# Altium PCB AD8310峰值检测.PcbDoc
Units mil, origin at the board's own origin, x right, y up, seen from the top; angles counter-clockwise.
Board outline 935 x 995 mil, 2 copper layers (Top Layer, Bottom Layer); 15 components, 8 nets, 38 pads, 0 vias.
Unrouted connection lines stored in the file: 4.
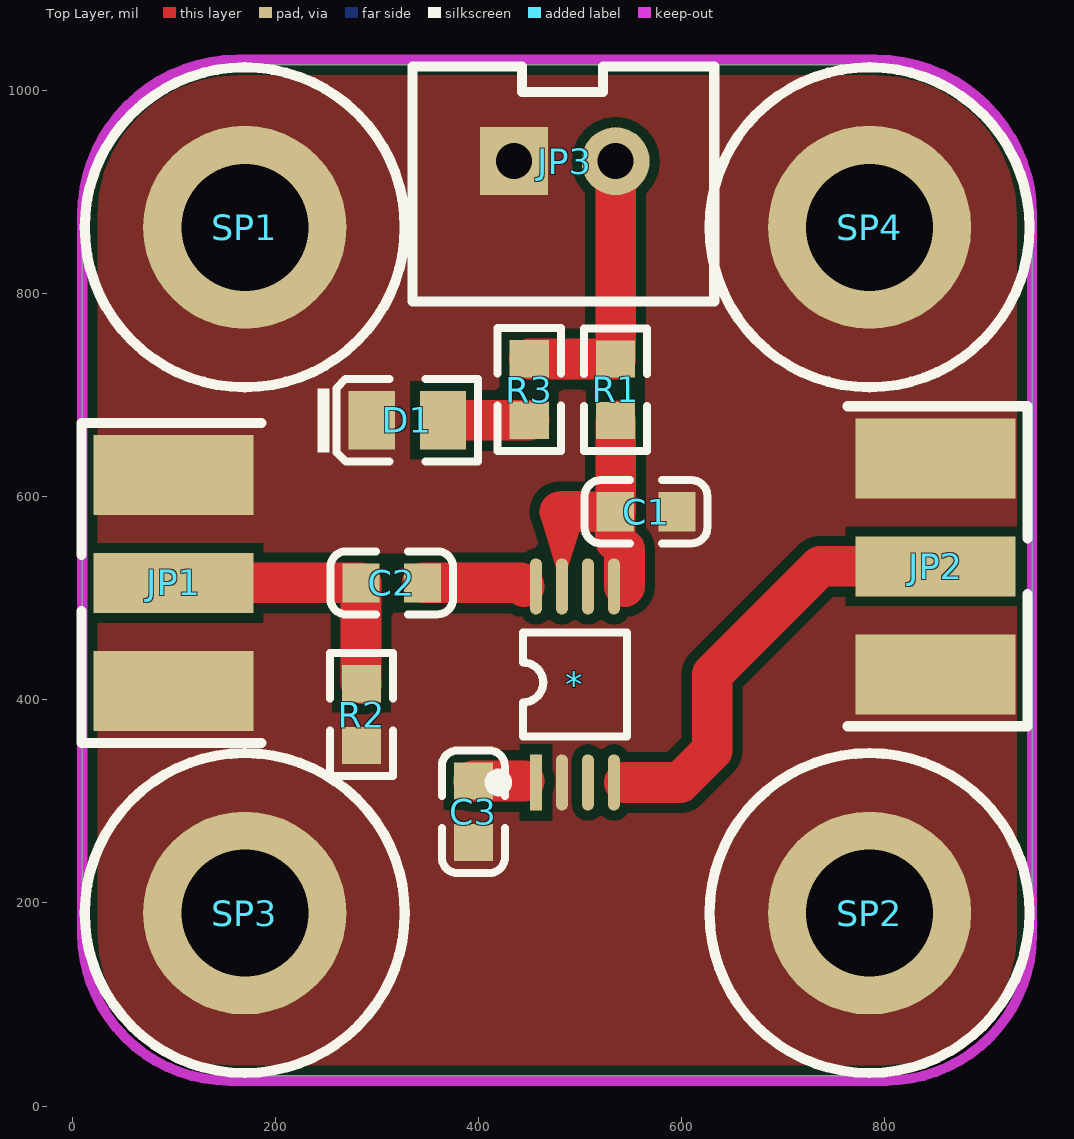
[diagram p0: Top Layer view]
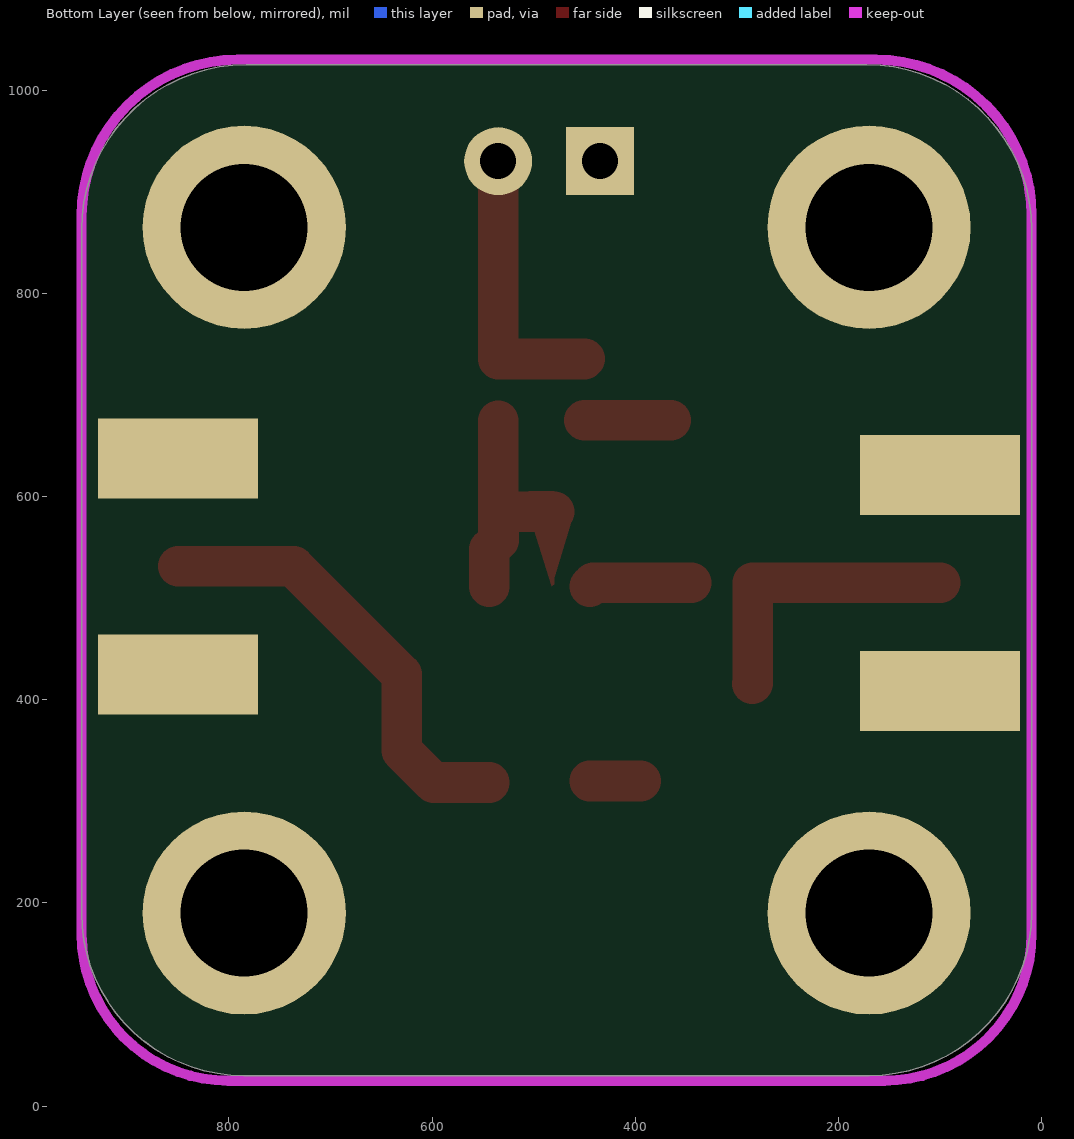
[diagram p1: Bottom Layer view, seen from below]

## Layer stack, top to bottom
Top Solder: solder mask 0.4, Solder Resist, Dk 3.5
Top Layer: signal copper 1.4
Dielectric 1: dielectric 12.6, FR-4, Dk 4.8
Bottom Layer: signal copper 1.4
Bottom Solder: solder mask 0.4, Solder Resist, Dk 3.5

## Board outline
10,190 ccw(c170,190) 170,30 210,30 785.19,30 ccw(c785.19,189.81) 945,189.81 945,862.92 ccw(c782.92,862.92) 782.92,1025 172.08,1025 ccw(c172.08,862.92) 10,862.92

## Design rules (kind name [scope] priority, off if disabled: settings)
Clearance [All] p1: gap=10 ignorepadtopadclearanceinfootprint=FALSE except(0: Arc-Hole Track-Hole SMDPad-Hole THPad-Hole Via-Hole Fill-Hole Poly-Hole Region-Hole Text-Hole)
PolygonConnect [All] p1: connectstyle=Direct reliefconductorwidth=10 reliefentries=4 polygonreliefangle="90 Angle" airgapwidth=10
RoutingVias [All] p1: holewidth=28 width=50 viastyle="Through Hole" minholewidth=28 minwidth=50 maxholewidth=28 maxwidth=50
SolderMaskExpansion [All] p1: expansion=4
Width [All] p1: maxlimit=40 minlimit=10 preferedwidth=15 bottomlayer_maxwidth=10 bottomlayer_prefwidth=10 minimp=50.000000 maximp=50.000000 favimp=50.000000
30 further rules are at their usual default settings.

## Components (designator, comment, footprint, x,y, rotation, side; value= is the part's Value field where it differs from the comment)
* "Component_1" MSOP8_N 495,415 r0 top
C1 "1.2nF (122) 10% 50V" 0603_C 565,585 r0 top
C2 "1.2nF (122) 10% 50V" 0603_C 314.69,515 r0 top
C3 "1.2nF (122) 10% 50V" 0603_C 395,289.68 r90 top
D1 "翠绿 0805" 0805_LED_S1 330.04,675 r0 top
JP1 "SMA WIFI 天线接口" SMA-KE 100,515 r90 top
JP2 "SMA WIFI 天线接口" SMA-KE 850,531.3 r270 top
JP3 "HDR-1X2" XH2.54-LI-2P 485,930 r0 top
R1 "1.5KΩ (1501) ±1%" 0603_R 535,705 r90 top
R2 "1.5KΩ (1501) ±1%" 0603_R 285,385.31 r90 top
R3 "1.5KΩ (1501) ±1%" 0603_R 450,705.32 r270 top
SP1 "M3铜柱" M3x4_L 170,865 r0 top
SP2 "M3铜柱" M3x4_L 785,190 r0 top
SP3 "M3铜柱" M3x4_L 170,190 r0 top
SP4 "M3铜柱" M3x4_L 785,865 r0 top

## Footprints (in the part's own frame and the unit in brackets; to place one, negate y for a bottom-side part, rotate by r counter-clockwise, add the part's x,y. Pads: shape width x height; smd on the part's side, far side on the other; paste and mask are expansions set on the pad)
0603_C [mm]
  rect 0.93x0.98 smd: 1(-0.77,0) 2(0.77,0)
  silkscreen extent -1.53,-0.79 1.54,0.79, body extent -0.8,-0.4 0.8,0.4, height 0.3
0603_R [mm]
  rect 0.93x0.98 smd: 1(-0.77,0) 2(0.77,0)
  silkscreen extent -1.53,-0.79 1.54,0.79, body extent -0.85,-0.4 0.85,0.4, height 0.56
0805_LED_S1 [mm]
  rect 1.16x1.47 smd: A(0.89,0) K(-0.89,0)
  silkscreen extent -2.24,-1.04 1.77,1.03, body extent -1.01,-0.62 1.01,0.62, height 1.1
M3x4_L [mil] "M3铜柱，长：4mm"
  round 200 hole 125: 1(0,0)
  silkscreen extent -157,-157 157,157, body extent -106,-93 106,93, height 159
MSOP8_N [mm] "塑封体长3mm，宽3mm，脚距0.65"
  rect 0.3x1.4 smd: 1(-0.975,-2.45)
  oval 0.3x1.4 smd: 2(-0.325,-2.45) 3(0.325,-2.45) 4(0.975,-2.45) 5(0.975,2.45) 6(0.325,2.45) 7(-0.325,2.45) 8(-0.975,2.45)
  silkscreen extent -2.07,-2.6 1.3,1.3, body extent -1.5,-2.45 1.5,2.45, height 0.95
SMA-KE [mm] "SMA 偏脚射频天线座     淘宝ID:黄晶宝石"
  rect 1.5x4 smd: 1(0,0)
  rect 2x4 smd: 2(-2.7,0) 2(2.7,0)
  rect 2x4 smd far side: 3(-2.7,0) 3(2.7,0)
  silkscreen extent -4,-2.2 4,2.3, body extent -3.25,-1.3 3.25,12.2, height 3.75
XH2.54-LI-2P [mm] "接插件，2P"
  rect 1.7x1.7 hole 0.9: 1(-1.27,0)
  round 1.7 hole 0.9: 2(1.27,0)
  silkscreen extent -3.81,-3.51 3.74,2.37, body extent -3.77,-3.3 3.77,2.4, height 7.05

## Part data
C1 C2 C3: library part "0603 1.2nF (122) 10% 50V", "贴片电容", Package=0603, SuppliersPartNumber=C30615, ComponentLink1Description=供应商链接, ComponentLink1URL=http://www.szlcsc.com/product/details_31372.html, Supplier=LC
D1: library part "0805 翠绿", "发光二极管", Package=0805, SuppliersPartNumber=C2297, ComponentLink1Description=供应商链接, ComponentLink1URL=http://www.szlcsc.com/product/details_2670.html, Supplier=LC
JP1 JP2: library part SMA, "SMA-2.4G射频天线接口"
JP3: library part "Header 2", "2P接插件", BOM名称=2P接插件
R1 R2 R3: library part "0603 1.5KΩ (1501) 1%", "贴片电阻", Package=0603, SuppliersPartNumber=C22843, ComponentLink1Description=供应商链接, ComponentLink1URL=http://www.szlcsc.com/product/details_23570.html, Supplier=LC
SP1 SP2 SP3 SP4: library part 铜柱小焊盘, "铜柱"

## Nets (pads, with @x,y where several pads share a name; then routed paths per layer and width w, separated by ;. In a path a pad name is that pad's centre, name@x,y a point inside that pad or via, vN(x,y) a via of type N, cw(c..) or ccw(c..) an arc to the next point about the centre after c; other vN are vias at no path point)
+5: JP3.2 R1.2 R3.1 | length 279.8
  Top Layer w40: R3.1 450.31,735.32 R1.2 JP3.2
GND: *.2 C1.2 C3.1 D1.K JP1.2 JP1.3 JP2.2 JP2.3 JP3.1 R2.1 SP1.1 SP2.1 SP3.1 SP4.1
input: C2.1 JP1.1 R2.2 | length 284
  Top Layer w40: JP1.1 C2.1 284.37,416.26 R2.2
Net*_1: *.1 C3.2 | length 49.8
  Top Layer w40: C3.2 444.84,320
Net*_5: *.5 *.7 C1.1 R1.1 | length 221.8
  Top Layer w40: 480,585 C1.1 ; R1.1 535,585.32 C1.1 ; 543.7,511.46 543.7,547.98 534.69,557 C1.1
Net*_8: *.8 C2.2 | length 101.5
  Top Layer w40: C2.2 441.46,515 445,511.46
NetD1_A: D1.A R3.2 | length 84.9
  Top Layer w40: D1.A R3.2
output: *.4 JP2.1 | length 438.4
  Top Layer w40: 543.7,318.54 598.54,318.54 630,350 630,425 736.3,531.3 JP2.1
pads on no net: *.3 *.6

## Polygon pours and split planes (outlines as drawn)
GND on Top Layer "Top Layer-No Net" (solid, pour order 0): 10,190 ccw(c170,190) 170,30 210,30 785.19,30 ccw(c785.19,189.81) 945,189.81 945,862.92 ccw(c782.92,862.92) 782.92,1025 172.08,1025 ccw(c172.08,862.92) 10,862.92

## Keep-outs
Keep-Out Layer:
  lines w10: 10,170 ccw(c155,170) 155,25 800.84,25 ccw(c800.84,169.16) 945,169.16 945,270 945,876.36 ccw(c791.36,876.36) 791.36,1030 235,1030 163.25,1030 ccw(c163.25,876.75) 10,876.75 10,170

## Other copper
Top Layer:
  region net Net*_5: 482.2,511.46 480,513.66 480,605 505,605 510,600
  region net Net*_5: 482.2,511.46
  region net Net*_5: 482.2,511.46 482.2,572.2 495,585 460,585
  region: 475,530

## Silkscreen, mask and mechanical layers (free items; w line width, h text height)
Mechanical 1:
  lines w10: 10,190 ccw(c170,190) 170,30 210,30 785.19,30 ccw(c785.19,189.81) 945,189.81 945,285 945,862.92 ccw(c782.92,862.92) 782.92,1025 295,1025 172.08,1025 ccw(c172.08,862.92) 10,862.92 10,190